# Altium PCB PCB1.PcbDoc
Units mil, origin at the board's own origin, x right, y up, seen from the top; angles counter-clockwise.
Board outline 5399 x 4169 mil, 2 copper layers (Top Layer, Bottom Layer), stack 60.4 mil thick; 34 components, 21 nets, 94 pads, 0 vias.
Unrouted connection lines stored in the file: 72.
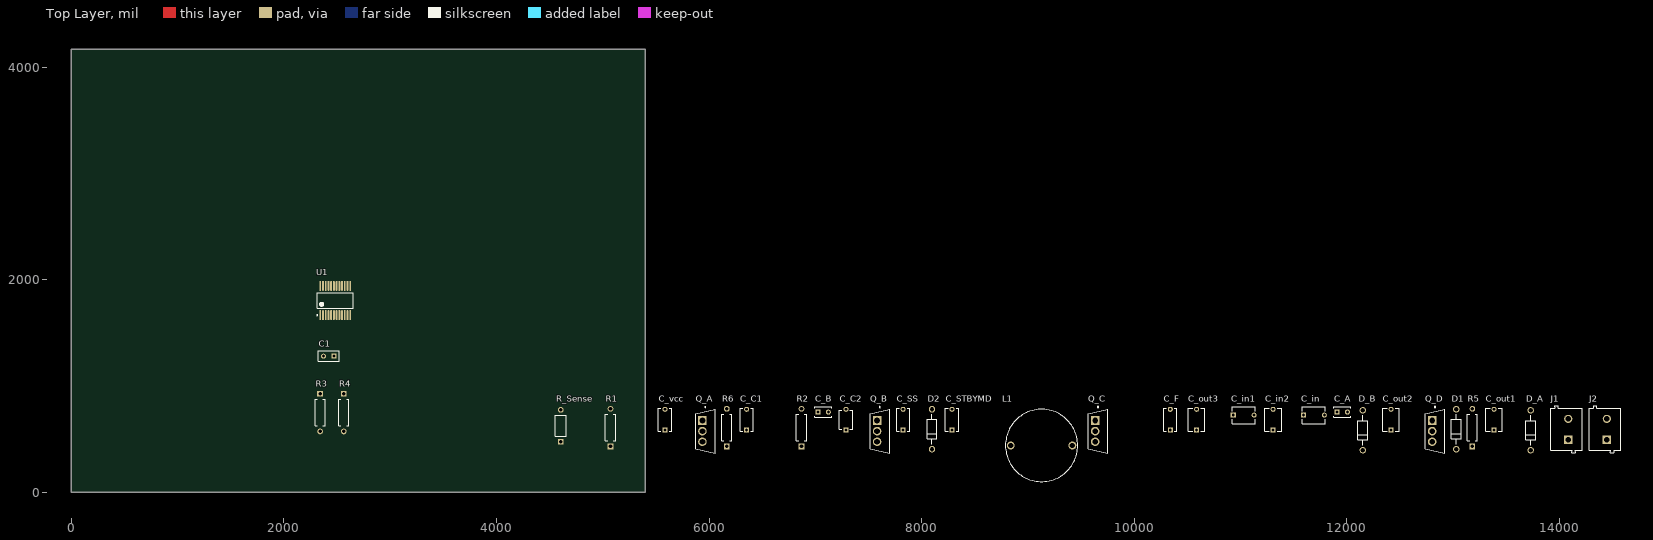
[diagram p0: Top Layer view]
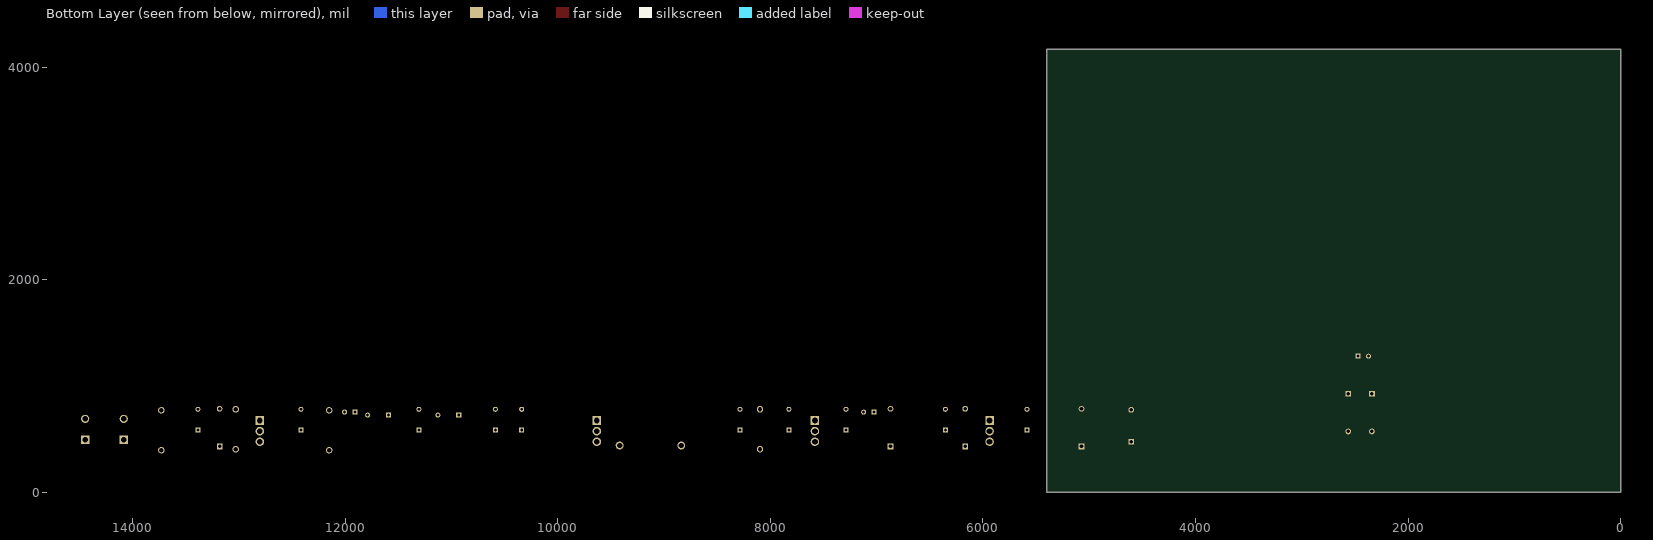
[diagram p1: Bottom Layer view, seen from below]

## Layer stack, top to bottom
Top Solder: solder mask 0.5, Solder Resist, Dk 3.3
Top Layer: signal copper 0.7
Dielectric1: core 59, FR-4, Dk 4.3
Bottom Layer: signal copper 0.7
Bottom Solder: solder mask 0.5, Solder Resist, Dk 3.3

## Board outline
0,0 5399,0 5399,4169 0,4169

## Design rules (kind name [scope] priority, off if disabled: settings)
Clearance [All] p1: gap=10 ignorepadtopadclearanceinfootprint=FALSE
DiffPairsRouting [All] p1: maxlimit=10 minlimit=10 mostfreqgap=10 toplayer_minwidth=10 toplayer_maxwidth=10 toplayer_prefwidth=10 bottomlayer_minwidth=10 bottomlayer_maxwidth=10 bottomlayer_prefwidth=10 maxuncoupledlength=500
HoleSize [All] p1: absolutevalues=TRUE maxlimit=300 minlimit=10 maxpercent=80.000 minpercent=20.000
MinimumAnnularRing [All] p1: minimumring=10
PasteMaskExpansion [All] p1: expansion=10
PlaneClearance [All] p1: clearance=15
PlaneConnect [All] p1: pad.planeconnectstyle=Relief pad.reliefexpansion=20 pad.reliefentries=4 pad.reliefconductorwidth=10 pad.reliefairgap=10 via.planeconnectstyle=Direct via.reliefexpansion=20 via.reliefentries=4 via.reliefconductorwidth=10 via.reliefairgap=10
PolygonConnect [All] p1: thpad.connectstyle=Relief thpad.reliefconductorwidth=10 thpad.reliefentries=4 thpad.polygonreliefangle="90 Angle" thpad.airgapwidth=10 smdpad.connectstyle=Relief smdpad.reliefconductorwidth=10 smdpad.reliefentries=4 smdpad.polygonreliefangle="90 Angle" smdpad.airgapwidth=10 via.connectstyle=Direct via.reliefconductorwidth=10 via.reliefentries=4 via.polygonreliefangle="90 Angle" via.airgapwidth=10
RoomDefinition Converter [InComponentClass('Converter')] p1: confinementstyle=ConfineIn formatcopy=TRUE lockcomponents=FALSE outline 4545,55 14592,55 14592,929 4545,929
RoutingVias [All] p1: holewidth=10 width=20 viastyle="Through Hole" minholewidth=10 minwidth=20 maxholewidth=10 maxwidth=20
SMDNeckDown [All] p1: percent=100.000
SilkToSolderMaskClearance SilkscreenOverComponentPads [IsPad] p1: minsilkscreentomaskgap=10 clearancetoexposedcopper=TRUE
SolderMaskExpansion [All] p1: expansion=10 istentingtop=FALSE
Width [All] p1: maxlimit=10 minlimit=10 preferedwidth=10
24 further rules are at their usual default settings.

## Components (designator, comment, footprint, x,y, rotation, side; value= is the part's Value field where it differs from the comment)
C1 "RDE5C2A680J0P1H03B" FP-RDE0P1-MFG 2422,1282 r180 top
C_A "0.47uF" FP-RCE1A2-MFG 11958,756 r0 top
C_B "0.47uF" FP-RCE1A2-MFG 7074,756 r0 top
C_C1 "RDER73A103K2K1H03B" FP-RDE2M1-MFG 6354,684 r90 top
C_C2 "RDE5C2E470J1K1H03B" FP-RDE1K1-MFG 7288,684 r90 top
C_F "RDE5C1H104J2K1H03B" FP-RDE2M1-MFG 10340,684 r90 top
C_in "RDEC71H226MWK1H03B" FP-RDEWK1-MFG 11691,727 r0 top
C_in1 "RDER71H335K3K1H03B" FP-RDE3M1-MFG 11031,727 r0 top
C_in2 "RDER71H335K3K1H03B" FP-RDE3M1-MFG 11308,684 r90 top
C_out1 "RDEC71E476MWK1H03B" FP-RDEWK1-MFG 13387,684 r90 top
C_out2 "RDEC71E476MWK1H03B" FP-RDEWK1-MFG 12418,684 r90 top
C_out3 "RDEC71E476MWK1H03B" FP-RDEWK1-MFG 10588,684 r90 top
C_SS "RDE5C1H104J2K1H03B" FP-RDE2M1-MFG 7827,684 r90 top
C_STBYMD "RDE5C1H104J2K1H03B" FP-RDE2M1-MFG 8287,684 r90 top
C_vcc "4.7uF" FP-RDE2M1-MFG 5585,684 r90 top
D1 "MBR150RLG" ONSC-AXIAL_LEAD-2-59-10_P 13031,595 r90 top
D2 "MBR150RLG" ONSC-AXIAL_LEAD-2-59-10_P 8098,595 r90 top
D_A "MBR150RLG" ONSC-AXIAL_LEAD-2-59-10_P 13731,585 r90 top
D_B "MBR150RLG" ONSC-AXIAL_LEAD-2-59-10_P 12152,585 r90 top
J1 "691102710002" 691102710002 14067,594 r90 top
J2 "691102710002" 691102710002 14430,594 r90 top
L1 "2000-4R7-H-RC" 20004R7HRC 8839,442 r0 top
Q_A "IRF530PBF" FP-X15-0364-MFG 5965,577 r0 top
Q_B "IRF530PBF" FP-X15-0364-MFG 7608,577 r0 top
Q_C "IRF530PBF" FP-X15-0364-MFG 9660,577 r0 top
Q_D "IRF530PBF" FP-X15-0364-MFG 12831,577 r0 top
R1 "MFR-25FBF52-1K" RESA60-630X240 5073,610 r90 top value=6.04k
R2 "MFR-25FBF52-1K" RESA60-630X240 6870,610 r90 top value=105k
R3 "MFR-25FBF52-1K" RESA60-630X240 2340,751 r270 top value=1k
R4 "MFR-25FBF52-1K" RESA60-630X240 2562.98,751 r270 top value=1k
R5 "MFR-25FBF52-1K" RESA60-630X240 13183,610 r90 top value=10
R6 "MFR-25FBF52-1K" RESA60-630X240 6167,610 r90 top value=105k
R_Sense "WLAR020FE" OMTE-WLA-2_V2 4605,627 r90 top
U1 "LTC3780IG#PBF" LT-G-24_M 2483,1806 r90 top

## Footprints (in the part's own frame and the unit in brackets; to place one, negate y for a bottom-side part, rotate by r counter-clockwise, add the part's x,y. Pads: shape width x height; smd on the part's side, far side on the other; paste and mask are expansions set on the pad)
20004R7HRC [mm]
  round 1.9 hole 1.267: 1(0,0) 2(14.732,0)
  silkscreen extent -1.27,-8.63 16,8.63, body extent -0.53,-7.9 15.27,7.9, height 9.61
691102710002 [mm] "5,00mm - modular - blue - Horizontal entry with pressure clamp - 9,9 mm height - 02p"
  rect 1.95x1.95 hole 1.3: 1(-2.5,-0.45)
  round 1.95 hole 1.3: 2(2.5,-0.45)
  silkscreen extent -5.6,-3.75 5.6,3.75, body extent -5.6,-3.75 5.6,3.75, height 9.96
FP-RCE1A2-MFG [mm]
  rect 1.2x1.2 hole 0.7 paste-1000 mask+0: 1(-1.25,0)
  round 1.2 hole 0.7 paste-1000 mask+0: 2(1.25,0)
  silkscreen extent -2,-1.25 2,1.25, body extent -2.1,-1.35 2.1,1.35, height 0.25
FP-RDE0P1-MFG [mm]
  rect 1.2x1.2 hole 0.7 paste-1000 mask+0: 1(-1.25,0)
  round 1.2 hole 0.7 paste-1000 mask+0: 2(1.25,0)
  silkscreen extent -2.5,-1.25 2.5,1.25, body extent -2.6,-1.35 2.6,1.35, height 0.25
FP-RDE1K1-MFG [mm]
  rect 1.2x1.2 hole 0.7 paste-1000 mask+0: 1(-2.5,0)
  round 1.2 hole 0.7 paste-1000 mask+0: 2(2.5,0)
  silkscreen extent -2.25,-1.58 2.25,1.58, body extent -3.2,-1.68 3.2,1.68, height 0.25
FP-RDE2M1-MFG [mm]
  rect 1.2x1.2 hole 0.7 paste-1000 mask+0: 1(-2.5,0)
  round 1.2 hole 0.7 paste-1000 mask+0: 2(2.5,0)
  silkscreen extent -2.75,-1.58 2.75,1.58, body extent -3.2,-1.68 3.2,1.68, height 0.25
FP-RDE3M1-MFG [mm]
  rect 1.2x1.2 hole 0.7 paste-1000 mask+0: 1(-2.5,0)
  round 1.2 hole 0.7 paste-1000 mask+0: 2(2.5,0)
  silkscreen extent -2.75,-2 2.75,2, body extent -3.2,-2.1 3.2,2.1, height 0.25
FP-RDEWK1-MFG [mm]
  rect 1.2x1.2 hole 0.7 paste-1000 mask+0: 1(-2.5,0)
  round 1.2 hole 0.7 paste-1000 mask+0: 2(2.5,0)
  silkscreen extent -2.75,-2 2.75,2, body extent -3.2,-2.1 3.2,2.1, height 0.25
FP-X15-0364-MFG [mm]
  rect 2.05x2.05 hole 1.35 paste-1000 mask+0: 1(-0.685,2.54)
  round 2.05 hole 1.35 paste-1000 mask+0: 2(-0.685,0) 3(-0.685,-2.54)
  silkscreen extent -2.32,-5.26 2.32,5.88, body extent -2.42,-5.36 2.42,5.36, height 0.25
LT-G-24_M [mm] "SOP, 24-Leads, Body 8.5x5.6mm, Pitch 0.65mm, IPC Low Density"
  oval 2.4x0.45 smd: 1(-3.5,3.575) 2(-3.5,2.925) 3(-3.5,2.275) 4(-3.5,1.625) 5(-3.5,0.975) 6(-3.5,0.325) 7(-3.5,-0.325) 8(-3.5,-0.975) 9(-3.5,-1.625) 10(-3.5,-2.275) 11(-3.5,-2.925) 12(-3.5,-3.575) 13(3.5,-3.575) 14(3.5,-2.925) 15(3.5,-2.275) 16(3.5,-1.625) 17(3.5,-0.975) 18(3.5,-0.325) 19(3.5,0.325) 20(3.5,0.975) 21(3.5,1.625) 22(3.5,2.275) 23(3.5,2.925) 24(3.5,3.575)
  silkscreen extent -3.62,-4.25 1.9,4.47, body extent -2.8,-4.25 2.8,4.25, height 2
OMTE-WLA-2_V2 [mm] "2-Leads, Axial leaded, Body 2.54x5.08mm, Pin Spacing 7.62mm"
  rect 1.35x1.35 hole 0.85: 1(-3.81,0)
  round 1.35 hole 0.85: 2(3.81,0)
  silkscreen extent -2.54,-1.27 2.54,1.27, body extent -4.11,-1.26 4.11,1.27, height 2.54
ONSC-AXIAL_LEAD-2-59-10_P [mm] "AXIAL, 2-Leads, Diameter 2.35mm"
  round 1.55 hole 1.05: 1(-4.77,0) 2(4.77,0)
  silkscreen extent -3.59,-1.17 3.59,1.17
RESA60-630X240 [mm] "Axial Resistor, 2-Leads, Dia 2.4mm, Body Length 6.3mm"
  rect 1.35x1.35 hole 0.85: 1(-4.5,0)
  round 1.35 hole 0.85: 2(4.5,0)
  silkscreen extent -3.15,-1.2 3.15,1.2, body extent -4.77,-1.19 4.77,1.2, height 2.4

## Part data
C1: library part CMP-06035-029057-1, "Ceramic Capacitor 68pF ±5% 100V C0G Radial", Capacitance=68pF, Case/Package=Radial, Dielectric=C0G, Max Operating Temperature=125°C, Min Operating Temperature=-55°C, Package Quantity=500, Resistor Type=Ceramic, Tolerance=5%, Voltage Rating=100V, Height=3.5mm, Height - Seated (Max)=0.236inch, Lead Diameter=0.5mm, Lead Pitch=0.098inch, Length=0.197inch, Mount="Through Hole", Packaging=Bulk, Termination=Radial, Voltage Rating (DC)=100V, Width=3.5mm
C_A C_B: library part CMP-06035-009921-1, "Cap Ceramic 470nF 50V X7R ±10% Radial 2.5mm +125°C Automotive Bulk", Capacitance=470nF, Case/Package=Radial, Dielectric=X7R, Max Operating Temperature=125°C, Min Operating Temperature=-55°C, Package Quantity=500, Ratings=AEC-Q200, Resistor Type=Ceramic, Tolerance=10%, Voltage Rating=50V, Height=3.5mm, Height - Seated (Max)=0.138inch, Lead Diameter=0.5mm, Lead Pitch=0.098inch, Lead/Base Style=Straight, Length=0.157inch, Mount="Through Hole", Packaging=Bulk, Termination=Radial, Voltage Rating (DC)=50V, Width=0.098inch
C_C1: library part CMP-06035-036813-1, "Ceramic Capacitor 10nF ±10% 1kV X7R Radial", Capacitance=10nF, Case/Package=Radial, Max Operating Temperature=125°C, Min Operating Temperature=-55°C, Tolerance=10%, Voltage Rating=1kV, Lead/Base Style="Formed Leads", Mount="Through Hole", Packaging=Bulk
C_C2: library part CMP-06035-055819-1, "Ceramic Capacitor 47pF ±5% 250V C0G Radial"
C_F C_SS C_STBYMD: library part CMP-06035-058915-1, "Ceramic Capacitor 100nF ±5% 50V C0G Radial"
C_in: library part CMP-06035-003638-1, "CAP CER 22UF 50V X7S RADIAL", Capacitance=22uF, Case/Package=Radial, Max Operating Temperature=125°C, Min Operating Temperature=-55°C, Tolerance=20%, Voltage Rating=50V, Lead/Base Style="Formed Leads", Mount="Through Hole", Packaging=Bulk
C_in1 C_in2: library part CMP-06035-014114-1, "Ceramic Capacitor 3.3uF ±10% 50V X7R Radial", Capacitance=3.3uF, Case/Package=Radial, Dielectric=X7R, Max Operating Temperature=125°C, Min Operating Temperature=-55°C, Package Quantity=500, Resistor Type=Ceramic, Tolerance=10%, Voltage Rating=50V, Height=5mm, Height - Seated (Max)=0.295inch, Lead Diameter=0.5mm, Lead Free="Lead Free", Lead Pitch=0.197inch, Lead/Base Style=Kinked, Length=0.217inch, Mount="Through Hole", Packaging=Bulk, Termination=Radial, Voltage Rating (DC)=50V, Width=0.157inch
C_out1 C_out2 C_out3: library part CMP-06035-015598-1, "Ceramic Capacitor 47uF ±20% 25V X7S Radial", Capacitance=47uF, Case/Package=Radial, Dielectric=X7S, Max Operating Temperature=125°C, Min Operating Temperature=-55°C, Package Quantity=500, Resistor Type=Ceramic, Tolerance=20%, Voltage Rating=25V, Height=7.5mm, Height - Seated (Max)=0.394inch, Lead Diameter=0.5mm, Lead Free="Lead Free", Lead Pitch=0.197inch, Lead/Base Style="Formed Leads", Length=0.217inch, Mount="Through Hole", Packaging=Bulk, Termination=Radial, Voltage Rating (DC)=25V, Width=0.157inch
C_vcc: library part CMP-06035-049833-1, "Ceramic Capacitor 4.7uF ±10% 50V X7S Radial", Case/Package=Radial, Dielectric=X7S, Max Operating Temperature=125°C, Min Operating Temperature=-55°C, Package Quantity=1500, Resistor Type=Ceramic, Tolerance=10%, Voltage Rating=50V, Capacitance=4.7uF, Height=4mm, Height - Seated (Max)=0.236inch, Lead Diameter=0.5mm, Lead Pitch=0.197inch, Lead/Base Style=Kinked, Length=0.217inch, Mount="Through Hole", Packaging="Tape and Reel", Termination=Radial, Voltage Rating (DC)=50V, Width=0.124inch
D1 D2 D_A D_B: library part CMP-1055-00046-1, "Rectifier, 2-Pin Axial_Lead, Pb-Free, Tape and Reel", Manufacturer="On Semiconductor", ComponentLink1Description="Manufacturer URL", ComponentLink1URL=http://www.onsemi.com/, ComponentLink2Description=Datasheet, ComponentLink2URL=http://www.onsemi.cn/pub_link/Collateral/MBR150-D.PDF, ComponentLink3Description="Package Specification", ComponentLink3URL=http://www.onsemi.cn/pub_link/Collateral/59-10.PDF, Configuration=Single, DatasheetVersion="Rev. 8", IFSM Max (A)=25, Mounting Technology="Through Hole", PackageDescription="2-Pin, Axial Lead, Diameter 2.35 mm", PackageReference=AXIAL_LEAD-2-59-10, PackageVersion="Rev. U, 02/2005", Packing="Tape and Reel", PartNumber=MBR150RLG, RoHS=TRUE
J1 J2: library part CMP-1502-03258-1, "Series 102 - 5.00 mm Horizontal Entry Modular with Pressure Clamp WR-TBL, 2 pin", Manufacturer="Wurth Elektronik", Operating Temperature=-40to105degC, Datasheet URL=http://katalog.we-online.de/em/datasheet/6911027100xx.pdf, Manufacturer URL=http://www.we-online.de, Mounting Technology=THT, Package Reference=691102710002, Packaging=Box, Part Number=691102710002, Pin Number=2, Pitch=5.00mm, Publisher=WurthElektronik
L1: "Inductor", Manufacturer_Name=Bourns, Datasheet Link=https://componentsearchengine.com/Datasheets/1/2000-4R7-H-RC.pdf, Height=10.414mm, Manufacturer_Part_Number=2000-4R7-H-RC
Q_A Q_B Q_C Q_D: library part CMP-02550-000190-1, "MOSFET N-CH 100V 14A TO-220AB", Continuous Drain Current=14A, Drain To Source Breakdown Voltage=100V, Drain To Source Resistance=0.16Ω, Gate To Source Voltage=20V, Input Capacitace At Vds="670pF @ 25V", Manufacturer=Vishay, Max Forward Diode Voltage=2.5V, Max Junction Temp=+175°C, Package=X15-0364, Power Dissipation=88W, Pulse Drain Current=56A, Temperature="-55°C to +175°C", Temperature Range Low=-55°C, Automotive=No, Category=Trans, ComponentLink2Description=Datasheet, ComponentLink2URL=http://www.vishay.com/docs/91019/91019.pdf, Depletion Mode=False, Device Class L1="Discrete Semiconductors", Device Class L2=Transistors, Device Class L3=MOSFETs, Digikey Description="MOSFET N-CH 100V 14A TO-220AB", Drain To Source Voltage=100V, Gate Charge At Vgs="26nC @ 10V", Height=19.89mm, Lead Free=Yes, Manufacturer Part Number=IRF530PBF, Mouser Description="MOSFET N-Chan 100V 14 Amp", Number Of Channels=1, Number Of N Channels=1, Octopart=https://octopart.com/irf530pbf-vishay-46547999, Reverse Recovery Charge=850nC, Reverse Recovery Time=150ns, RoHS=TRUE, Rthja Max=62°C/W, Standoff Height=3.33mm, Temperature Range High=+175°C, Threshold Vgs Max=4V, Threshold Vgs Min=2V, Turn Off Delay Time=23ns, Turn On Delay Time=10ns
R1 R2 R3 R4 R5 R6: library part CMP-009-00048-4, "Axial Resistor, 1 KOhm, +/- 1%, 250 mW, -55 to 155 degC, 2-Pin THD, RoHS, Bulk", Case/Package=Axial, Manufacturer=Yageo, Max Operating Temperature=155°C, Min Operating Temperature=-55°C, Package Description="2-Pin Axial Lead, Dia 2.4 mm, Body Length 6.3 mm", Package Quantity=200, Package Reference=MFR-25, Power=250mW, Tolerance=1%, Voltage Rating=250V, Composition=CarbonFilm, Datasheet URL=http://www.yageo.com/documents/recent/Yageo%20LR_MFR_2013.pdf, Datasheet Version=Apr-13, Manufacturer URL=http://www.yageo.com/, Mounting Technology=TH, Packaging=Bulk, RoHS Compliant=True
R_Sense: library part CMP-1237-00001-1, "Miniature Wirewound Current Sense, 0.02 Ohm +/-1%, 0.5 W, 2-Pin THD, RoHS, 25pc Pack", Manufacturer=Ohmite, Power Rating="0.5 W", Rated Resistance="0.02 Ohm", Resistance Tolerance=+/-1%, ComponentLink1Description="Manufacturer URL", ComponentLink1URL=http://www.ohmite.com/, ComponentLink2Description=Datasheet, ComponentLink2URL=http://www.ohmite.com/cat/res_wl.pdf, ComponentLink3Description="Package Specification", ComponentLink3URL=http://www.ohmite.com/cat/res_wl.pdf, DatasheetVersion=May-14, Mounting Technology="Through Hole", PackageDescription="2-Pin Axial Lead, Body 5.08 x 2.54 mm, Lead Spread 25 mm", Packing="25pc Pack", PartNumber=WLAR020FE, RoHS=TRUE
U1: library part CMP-0492-00697-1, "Buck-boost Controller, Constant Frequency, Current Mode Control with Power Good Output, 24-pin SOP (G-24), -40 to 125 degC, Pb-Free", Frequency Sync Range="200kHz - 400kHz", Manufacturer="Linear Technology", ComponentLink1Description="Manufacturer URL", ComponentLink1URL=http://www.linear.com/, ComponentLink2Description=Datasheet, ComponentLink2URL=http://cds.linear.com/docs/en/datasheet/3780ff.pdf, ComponentLink3Description="Package Specification", ComponentLink3URL=http://cds.linear.com/docs/en/packaging/SSOP_24_05-08-1640.pdf, DatasheetVersion="Rev. F", Mounting Technology="Surface Mount", Number of Outputs=1, PackageDescription="24-Pin Plastic SSOP, Body 8.2 x 5.3 mm, Pitch 0.65 mm", PackageReference=G-24, PackageVersion=Jun-10, PartNumber=LTC3780IG#PBF, RoHS=TRUE

## Nets (pads, with @x,y where several pads share a name; then routed paths per layer and width w, separated by ;. In a path a pad name is that pad's centre, name@x,y a point inside that pad or via, vN(x,y) a via of type N, cw(c..) or ccw(c..) an arc to the next point about the centre after c; other vN are vias at no path point)
BG1: Q_C.1 U1.18
BG2: Q_B.1 U1.16
GND: C_C1.2 C_C2.2 C_F.2 C_in1.2 C_in2.2 C_in.2 C_out1.2 C_out2.2 C_out3.2 C_SS.2 C_STBYMD.2 C_vcc.2 J1.2 J2.2 R1.1 R4.2 R_Sense.1 U1.7 U1.9 U1.10 U1.11 U1.17 U1.20
INTVcc: C_vcc.1 D_A.2 D_B.2 U1.19
NetC1_1: C1.1 R4.1 U1.4
NetC1_2: C1.2 R3.1 U1.3
NetC_A_2: C_A.2 D_A.1 U1.24
NetC_B_2: C_B.2 D_B.1 U1.13
NetC_C1_1: C_C1.1 R6.1
NetC_C2_1: C_C2.1 R6.2 U1.5
NetC_F_1: C_F.1 R5.2 U1.21
NetC_SS_1: C_SS.1 U1.2
NetC_STBYMD_1: C_STBYMD.1 U1.12
NetD2_2: D2.2 Q_B.3 Q_C.3 R3.2 R_Sense.2
NetR1_2: R1.2 R2.1 U1.6
SW1: C_A.1 D1.2 L1.1 Q_C.2 Q_D.3 U1.22
SW2: C_B.1 D2.1 L1.2 Q_A.3 Q_B.2 U1.15
TG1: Q_D.1 U1.23
TG2: Q_A.1 U1.14
VCC: C_in1.1 C_in2.1 C_in.1 J1.1 Q_A.2 R5.1 U1.8
Vout: C_out1.1 C_out2.1 C_out3.1 D1.1 J2.1 Q_D.2 R2.2
pads on no net: U1.1